# Altium PCB C PCB.PcbDoc
Units mm, origin at the board's own origin, x right, y up, seen from the top; angles counter-clockwise.
Board outline 24.85 x 16.18 mm, 2 copper layers (Top Layer, Bottom Layer); 17 components, 10 nets, 32 pads, 20 vias.
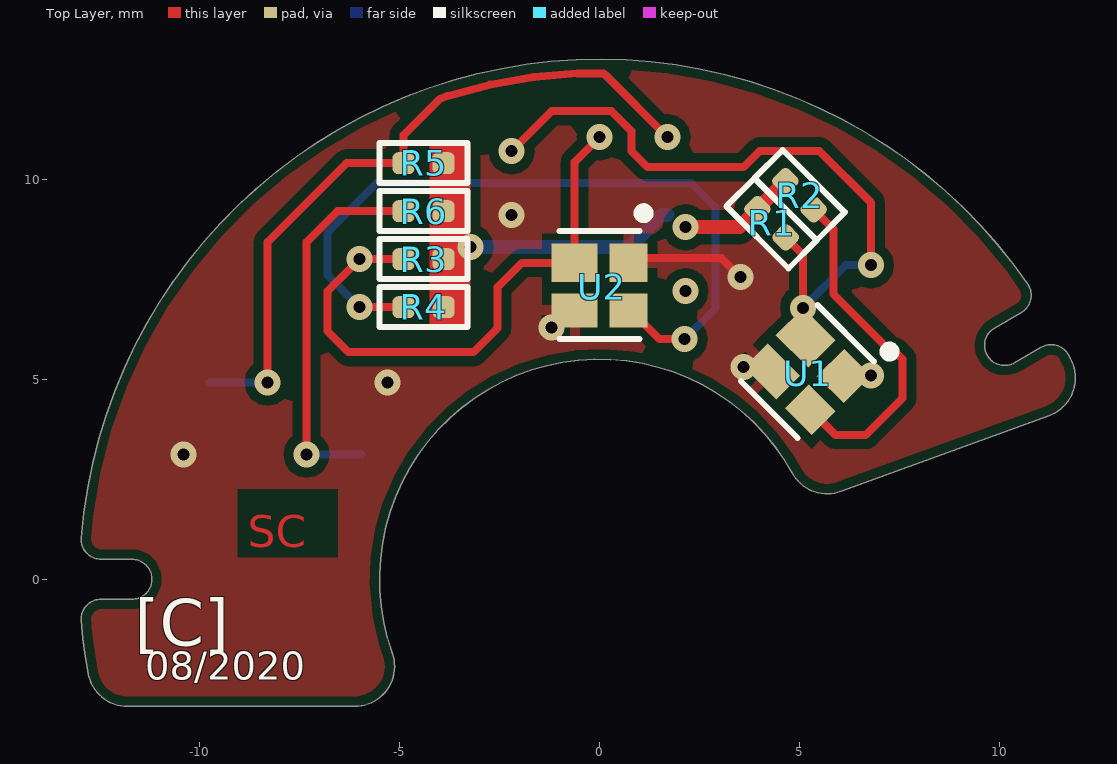
[diagram p0: Top Layer view]
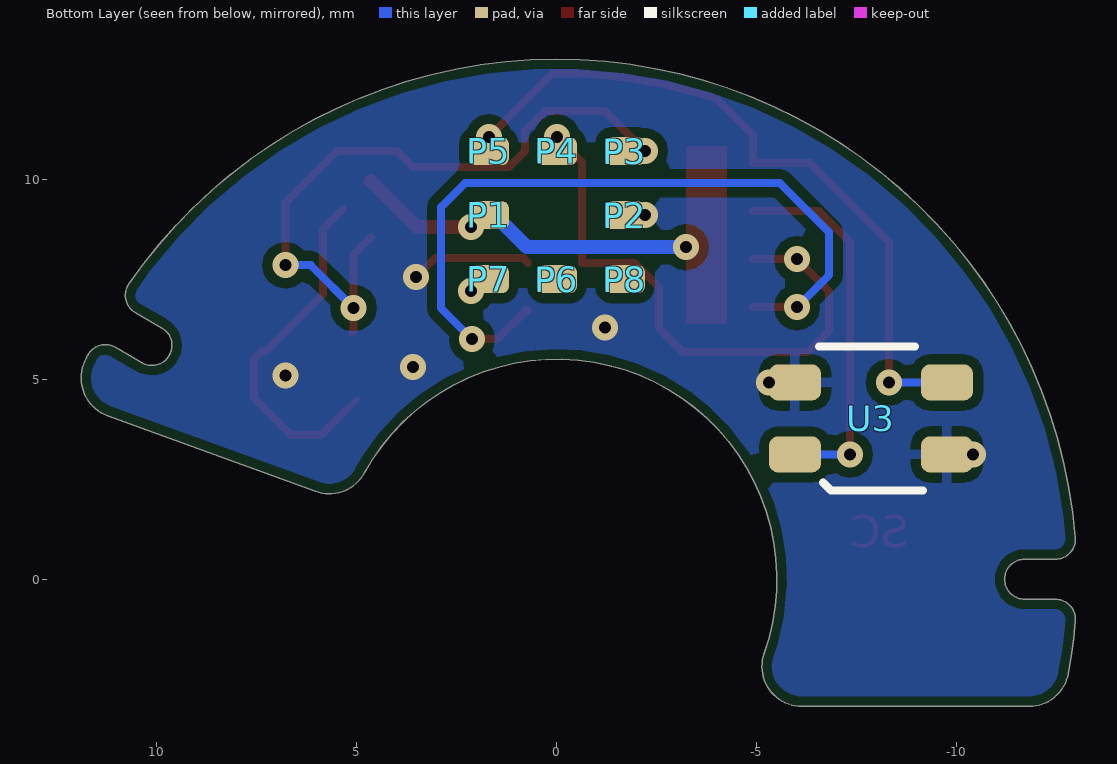
[diagram p1: Bottom Layer view, seen from below]
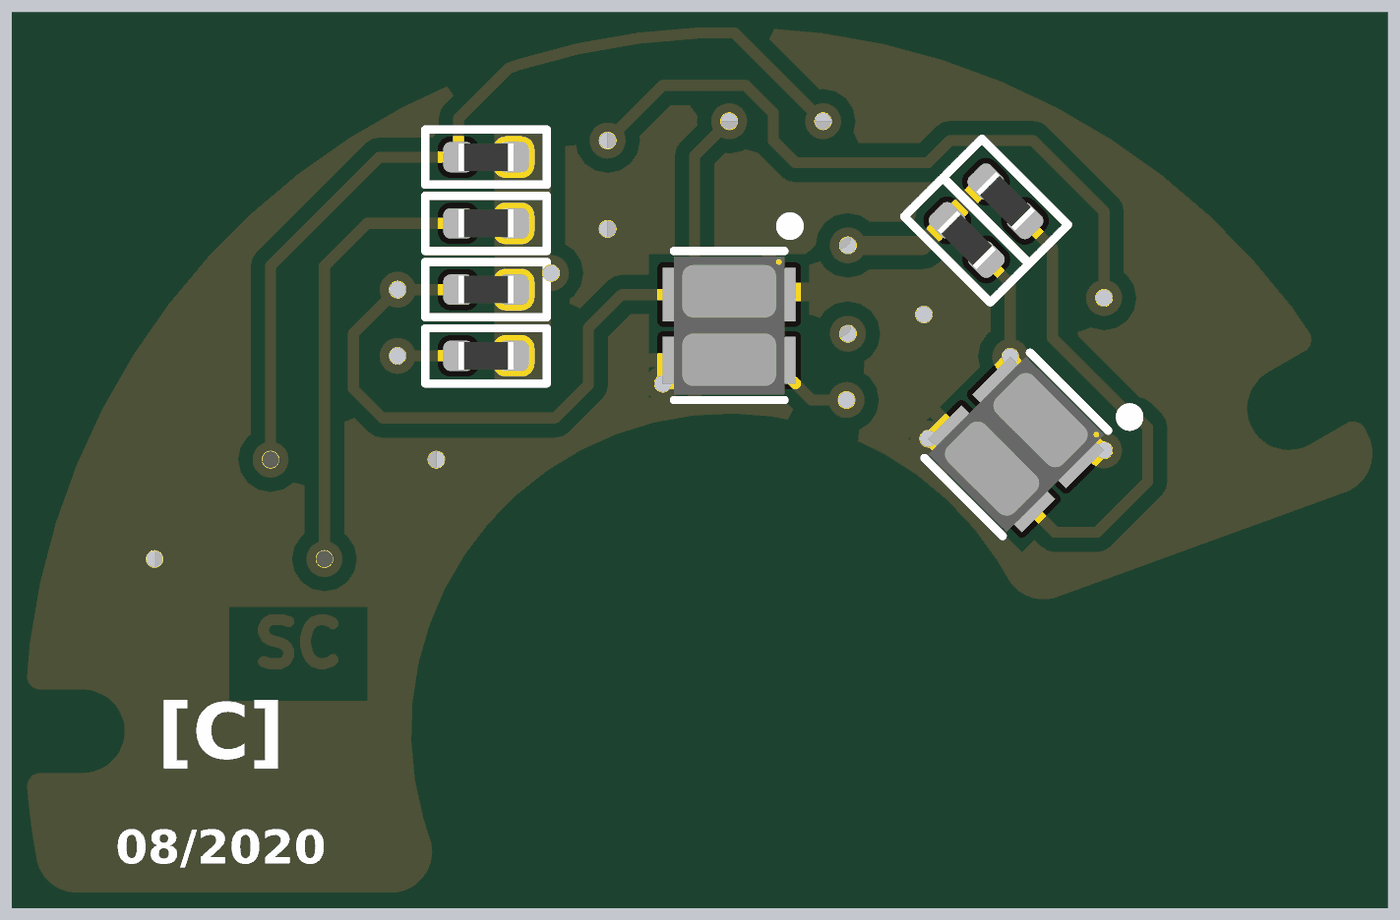
[diagram p2: 3D render of the assembled board from above, using the file's embedded part models]

## Layer stack, top to bottom
Top Solder: solder mask 0.0102, Solder Resist, Dk 3.5
Top Layer: signal copper 0.0356
Dielectric 1: dielectric 0.32, FR-4, Dk 4.8
Bottom Layer: signal copper 0.0356
Bottom Solder: solder mask 0.0102, Solder Resist, Dk 3.5

## Board outline
-12.784,-2.36 cw(c0,0) -12.958,-1.04 cw(c-12.46,-1) -12.46,-0.5 -11.691,-0.5 ccw(c-11.691,0) -11.691,0.5 -12.46,0.5 cw(c-12.46,1) -12.958,1.04 cw(c0,0) 10.702,7.38 cw(c10.291,7.096) 10.541,6.663 9.874,6.278 ccw(c10.124,5.845) 10.374,5.412 11.041,5.797 cw(c11.291,5.364) 11.742,5.578 11.742,5.579 cw(c0,0) 11.803,5.449 cw(c10.895,5.03) 11.237,4.09 6.035,2.197 cw(c5.693,3.136) 4.817,2.654 ccw(c0,0) -5.182,-1.843 cw(c-6.124,-2.179) -6.124,-3.179 -11.801,-3.179 cw(c-11.801,-2.179)

## Design rules (kind name [scope] priority, off if disabled: settings)
BoardOutlineClearance [All] p1: gap=0.25 ignorepadtopadclearanceinfootprint=FALSE
Clearance [All] p1: gap=0.25 ignorepadtopadclearanceinfootprint=FALSE except(0.2: Arc-Arc Arc-Track Arc-SMDPad Arc-THPad Arc-Via Arc-Text Arc-Hole Track-Track Track-SMDPad Track-THPad Track-Via Track-Text Track-Hole SMDPad-SMDPad SMDPad-THPad SMDPad-Via SMDPad-Text SMDPad-Hole THPad-THPad THPad-Via THPad-Text THPad-Hole Via-Via Via-Text Via-Hole Text-Text Text-Hole)
DiffPairsRouting [All] p1: maxlimit=0.5 minlimit=0.15 mostfreqgap=0.2 toplayer_minwidth=0.15 toplayer_maxwidth=1 toplayer_prefwidth=0.2 bottomlayer_minwidth=0.15 bottomlayer_maxwidth=1 bottomlayer_prefwidth=0.2 maxuncoupledlength=12.7
HoleSize [All] p1: absolutevalues=TRUE maxlimit=6 minlimit=0.025 maxpercent=80.000 minpercent=20.000
MinimumSolderMaskSliver [All] p1: minsoldermaskwidth=0
PlaneClearance [All] p1: clearance=0.5
PlaneConnect [All] p1: planeconnectstyle=Relief reliefexpansion=0.5 reliefentries=4 reliefconductorwidth=0.25 reliefairgap=0.25
PolygonConnect [All] p1: connectstyle=Relief reliefconductorwidth=0.25 reliefentries=4 polygonreliefangle="90 Angle" airgapwidth=0.25
RoutingVias [All] p1: holewidth=0.3 width=0.6 viastyle="Through Hole" minholewidth=0.3 minwidth=0.5 maxholewidth=0.6 maxwidth=7
SilkToSilkClearance [All] p1: silktosilkclearance=0
SilkToSolderMaskClearance [IsPad] p1: minsilkscreentomaskgap=0 clearancetoexposedcopper=TRUE
SolderMaskExpansion [All] p1: expansion=0.102 istentingtop=FALSE
Width [All] p1: maxlimit=20 minlimit=0.15 preferedwidth=0.2
23 further rules are at their usual default settings.

## Components (designator, comment, footprint, x,y, rotation, side; value= is the part's Value field where it differs from the comment)
P1 "PAD_4" PAD_0.5X1MM 1.7,9.1 r180 bottom
P2 "PAD_4" PAD_0.5X1MM -1.7,9.1 r180 bottom
P3 "PAD_4" PAD_0.5X1MM -1.7,10.7 r180 bottom
P4 "PAD_4" PAD_0.5X1MM 0,10.7 r180 bottom
P5 "PAD_4" PAD_0.5X1MM 1.7,10.7 r180 bottom
P6 "PAD_4" PAD_0.5X1MM 0,7.5 r180 bottom
P7 "PAD_4" PAD_0.5X1MM 1.7,7.5 r180 bottom
P8 "PAD_4" PAD_0.5X1MM -1.7,7.5 r180 bottom
R1 "2.7K" RESC0402X04N 4.3,8.9 r135 top
R2 "2.7K" RESC0402X04N 5,9.6 r135 top
R3 "2.7K" RESC0402X04N -4.4,8 r0 top
R4 "2.7K" RESC0402X04N -4.4,6.8 r0 top
R5 "2.7K" RESC0402X04N -4.4,10.4 r0 top
R6 "2.7K" RESC0402X04N -4.4,9.2 r0 top
U1 "VCNT2020" VCNT2020 5.197,5.197 r225 top locked
U2 "VCNT2020" VCNT2020 0,7.35 r270 top locked
U3 "QRE1113GR" QRE1113GR -7.85,4.02 r180 bottom locked

## Footprints (in the part's own frame and the unit in brackets; to place one, negate y for a bottom-side part, rotate by r counter-clockwise, add the part's x,y. Pads: shape width x height; smd on the part's side, far side on the other; paste and mask are expansions set on the pad)
PAD_0.5X1MM [mm]
  rrect50% 1x0.7 smd: 1(0,0)
QRE1113GR [mm]
  rrect50% 1.3x0.9 smd: 1(-1.9,-0.9) 2(1.9,-0.9) 3(1.9,0.9) 4(-1.9,0.9)
  silkscreen extent -1.3,-1.8 1.3,1.8, body extent -2.4,-1.8 2.4,1.8, height 1.71
RESC0402X04N [mm] "Chip Resistor, 2-Leads, Body 1.00x0.50mm, IPC Medium Density"
  rrect50% 0.55x0.55 smd: 1(-0.5,0) 2(0.5,0)
  silkscreen extent -1.1,-0.5 1.1,0.5, body extent -0.5,-0.25 0.5,0.25, height 0.35
VCNT2020 [mm] "4-SMD"
  rect 0.97x0.95 smd: 1(-0.56,0.725)
  rect 0.97x1.15 smd: 2(-0.56,-0.625)
  rect 0.85x0.95 smd: 3(0.63,0.725)
  rect 0.85x1.15 smd: 4(0.63,-0.625)
  silkscreen extent -1.92,-1 1.35,1.22, body extent -1.25,-1 1.25,1, height 0.81

## Part data
P1 P2 P3 P4 P5 P6 P7 P8: "a Rec pad, 0.5X1mm"
R1 R2 R3 R4 R5 R6: library part "RES 2.7K", "RES SMD 2.7K OHM 1% 1/16W 0402", Manufacturer=YAGEO, Manufacturer Part Number=AC0402FR-072K7L, Package / Case=0402, Supplier Part Number 1=C144771, Category=Resistors, Resistance=2.7K, Supplier 1=LCSC
U1 U2: "REFLECTIVE SENSOR WITH PTR OUTPU", Case="4-SMD Module", Manufacturer="Vishay Semiconductor Opto Division", Supplier Part Number 1=161-2156, Category="Optical Sensors", Manufacturer Part Number=VCNT2020, Supplier 1=RS
U3: "SENSOR OPTO TRANS REFL SMD PHOTO", Case="4-SMD Module", Manufacturer="ON Semiconductor", Category="Optical Sensors", Manufacturer Part Number=QRE1113GR

## Via types
v1: diameter 0.65, hole 0.3, Top Layer to Bottom Layer, tented both sides, 20 vias

## Nets (pads, with @x,y where several pads share a name; then routed paths per layer and width w, separated by ;. In a path a pad name is that pad's centre, name@x,y a point inside that pad or via, vN(x,y) a via of type N, cw(c..) or ccw(c..) an arc to the next point about the centre after c; other vN are vias at no path point)
3V3: P1.1 R1.2 R2.2 R3.2 R4.2 R5.2 R6.2 | length 11.8
  Top Layer w0.35: R4.2 R3.2 R6.2 R5.2 ; v1(2.149,8.801) 3.494,8.801 R1.2 R2.2
  Bottom Layer w0.35: v1(-3.225,8.3) 0.75,8.3 1.55,9.1 P1.1
B_GND: P2.1 U1.1 U1.4 U2.1 U2.4 U3.2 U3.4 | length 3
  Top Layer w0.2: U2.1 0.84,8.025 3.05,8.025 v1(3.525,7.55)
  other v1: -10.4,3.12 -5.3,4.92 6.784,5.087 3.602,5.3 -1.2,6.295 -2.2,9.1
GND: P7.1
  other v1: 2.149,7.201
LD1: R2.1 U1.3 | length 9
  Top Layer w0.15: U1.3@5,4.5 U1.3
  Top Layer w0.2: U1.3 5.898,3.602 6.652,3.602 7.15,4.1 7.575,4.525 7.575,5.5 7.375,5.7 7.275,5.7 5.85,7.125 5.85,8.75 R2.1
LD2: R4.1 U2.3 | length 19.1
  Top Layer w0.2: v1(-6,6.8) R4.1 ; U2.3 0.775,6.72 1.495,6 v1(2.125,6)
  Bottom Layer w0.2: v1(-6,6.8) -6.8,7.6 -6.8,8.675 -5.575,9.9 2.3,9.9 2.9,9.3 2.9,6.775 v1(2.125,6)
LD3: R6.1 U3.1 | length 9.4
  Top Layer w0.2: v1(-7.325,3.12) -7.325,8.425 -6.55,9.2 R6.1
  Bottom Layer w0.2: v1(-7.325,3.12) U3.1
S1: P3.1 R1.1 U1.2 | length 17.3
  Top Layer w0.2: v1(-2.2,10.7) -1.2,11.7 0.3,11.7 0.8,11.2 0.8,10.7 1.2,10.3 3.6,10.3 4,10.7 5.5,10.7 6.784,9.416 6.784,7.916 v1@6.8,7.9 ; R1.1 5.087,8.113 5.087,6.188 U1.2@5.125,6.15 ; v1(6.784,7.85) v1@6.784,7.9
  Bottom Layer w0.2: v1(5.087,6.784) 6.153,7.85 v1(6.784,7.85)
S2: P4.1 R3.1 U2.2 | length 14.5
  Top Layer w0.2: v1(-6,8) -6.8,7.2 -6.8,6.2 -6.275,5.675 -3.15,5.675 -2.55,6.275 -2.55,7.3 -1.94,7.91 U2.2 -0.625,10.425 v1(0,11.05) v1@0,11.1 ; v1@-5.95,8 R3.1
S3: P5.1 R5.1 U3.3 | length 17.6
  Top Layer w0.2: v1(-8.3,4.92) -8.3,8.425 -6.325,10.4 R5.1 -4.9,11.1 -3.99,12.01 -3.811,12.075 -2.737,12.363 -1.643,12.555 -0.556,12.649 0.101,12.649 0.159,12.591 v1(1.7,11.05)
  Bottom Layer w0.2: U3.3 v1(-8.3,4.92)
VIN: P6.1
pads on no net: P8.1

## Polygon pours and split planes (outlines as drawn)
B_GND on Bottom Layer "B_GND_L02_P000" (solid, remove dead copper, pour order 0): -13,-3.2 -13,13 11.9,13 11.9,-3.2
B_GND on Top Layer "B_GND_L01_P001" (solid, remove dead copper, pour order 1): -13,-3.2 -13,13 11.9,13 11.9,-3.2

## Other copper
Top Layer:
  rectangle net 3V3: -4.25,6.375 -3.225,10.825
  text "SC" at -8.8,0.8 h0.8

## Silkscreen, mask and mechanical layers (free items; w line width, h text height)
Top Overlay:
  text "[C]" at -11.62,-2.054 h2
  text "08/2020" at -11.361,-2.756 h1.2
Mechanical 1:
  the board outline again, w0.2